# EAGLE board NE555_ADSR (EAGLE 7.4.0)

Size 160 x 100 mm. Coordinates in mm from the lower left corner, seen from the top.
Outline: 0,0 160,0 160,100 0,100 0,0
Copper layers (1*16): Top 0.035mm / dielectric 1.5mm / Bottom 0.035mm
Design rules "default": minimum track width 10mil, minimum drill 24mil, track to track 8mil, track to pad 8mil, pad to pad 8mil, via to via 8mil, smd to smd 8mil, copper to edge 40mil, drill to drill 8mil, minimum pad ring 10mil, minimum via ring 8mil, stop-mask expansion 4mil, vias tented up to drill 0mil, thermal gap 10mil

## Footprints (pad centres in the part's own frame; a part is rotated, then mirrored left to right if it is on the bottom)
E3,5-8 = drill 0.813 pad 1.6: + -1.778,0 | drill 0.813 pad 1.6 octagon: - 1.778,0
C7.5B3 = drill 0.914 pad 1.905 octagon: 1 -3.81,0; 2 3.81,0
DO35-7 = drill 0.813 long: A 3.81,0; C -3.81,0
DIL08-ROUND = drill 0.813 pad 1.676: 1 -3.81,-3.81; 2 -1.27,-3.81; 3 1.27,-3.81; 4 3.81,-3.81; 5 3.81,3.81; 6 1.27,3.81; 7 -1.27,3.81; 8 -3.81,3.81
DIL08 = drill 0.813 pad 1.27: 1 -3.81,-3.81; 2 -1.27,-3.81; 3 1.27,-3.81; 4 3.81,-3.81; 5 3.81,3.81; 6 1.27,3.81; 7 -1.27,3.81; 8 -3.81,3.81
1X06 = drill 1.016 octagon: 1 -6.35,0; 2 -3.81,0; 3 -1.27,0; 4 1.27,0; 5 3.81,0; 6 6.35,0
1X02 = drill 1.016 long: 1 -1.27,0; 2 1.27,0
1X03 = drill 1.016 long: 1 -2.54,0; 2 0,0; 3 2.54,0
0207/10 = drill 0.813 octagon: 1 -5.08,0; 2 5.08,0
TO92 = drill 0.813 octagon: 1 1.27,0; 2 0,1.905; 3 -1.27,0

## Placement (x,y rotation side)
C1  [E3,5-8]  -45.72,5.08 0 top  (outside the outline)
C2  [E3,5-8]  -55.88,5.08 0 top  (outside the outline)
C3  10n  [C7.5B3]  -19.05,24.13 0 top  (outside the outline)
C4  10n  [C7.5B3]  -30.48,24.13 0 top  (outside the outline)
C5  4uF  [E3,5-8]  -19.05,15.24 0 top  (outside the outline)
D1  1N4148  [DO35-7]  -19.05,31.75 0 top  (outside the outline)
D2  1N4148  [DO35-7]  -31.75,31.75 0 top  (outside the outline)
D3  1N4148  [DO35-7]  -44.45,31.75 0 top  (outside the outline)
D4  1N4148  [DO35-7]  -57.15,31.75 0 top  (outside the outline)
D6  1N4148DO35-7  [DO35-7]  -46.99,24.13 0 top  (outside the outline)
D7  1N4148  [DO35-7]  -19.05,38.1 0 top  (outside the outline)
IC1  NE555N  [DIL08-ROUND]  -19.05,5.08 0 top  (outside the outline)
IC2  TL082P  [DIL08]  -31.75,5.08 0 top  (outside the outline)
JP1  [1X06]  -45.72,36.83 0 top  (outside the outline)
JP2  [1X02]  -27.94,36.83 0 top  (outside the outline)
JP3  [1X02]  -34.29,36.83 0 top  (outside the outline)
JP4  2M2_A  [1X02]  -52.07,13.97 0 top  (outside the outline)
JP5  2M2_R  [1X02]  -44.45,13.97 0 top  (outside the outline)
JP6  2M2_D  [1X02]  -36.83,13.97 0 top  (outside the outline)
JP7  10k_S  [1X03]  -27.94,13.97 0 top  (outside the outline)
R1  4k7  [0207/10]  -57.15,43.18 0 top  (outside the outline)
R2  10k  [0207/10]  -19.05,48.26 0 top  (outside the outline)
R3  22k  [0207/10]  -31.75,48.26 0 top  (outside the outline)
R4  4k7  [0207/10]  -44.45,48.26 0 top  (outside the outline)
R5  4k7  [0207/10]  -57.15,48.26 0 top  (outside the outline)
R6  10k  [0207/10]  -19.05,53.34 0 top  (outside the outline)
R7  [0207/10]  -31.75,53.34 0 top  (outside the outline)
R8  220  [0207/10]  -44.45,53.34 0 top  (outside the outline)
R9  [0207/10]  -57.15,53.34 0 top  (outside the outline)
R10  [0207/10]  -19.05,58.42 0 top  (outside the outline)
R11  3.3k  [0207/10]  -31.75,58.42 0 top  (outside the outline)
T1  2N3904  [TO92]  -22.86,43.18 0 top  (outside the outline)
T2  2N3904  [TO92]  -35.56,43.18 0 top  (outside the outline)
T3  2N3904  [TO92]  -48.26,43.18 0 top  (outside the outline)

## Library data of the parts
C1 C2 C5 R1-R11 = resistor
C3 C4 = capacitor-wima
D1-D4 D6 D7 = diode
IC1 JP1 = adafruit
IC2 = linear; DATA_SHEET: <a href="http://www.ti.com/lit/ds/symlink/tl084a.pdf"> Data sheet </a>
JP2-JP7 = pinhead
T1-T3 = transistor

## Nets
A: D7.A IC1.3
GND: C1.- C2.+ C4.2 C5.- D1.A D6.A IC1.1 IC2.8 JP1.3 JP1.4 JP2.1 T1.3 T2.3 T3.3
N$1: R6.1 T3.2
N$2: JP2.2 R2.2
N$3: JP4.2 R8.2
N$4: C4.1 IC1.5
N$5: R1.1 R3.1 T1.1
N$6: D3.C JP7.2
N$7: IC1.2 R5.1 T3.1
N$8: D6.C R2.1 R7.1 T1.2
N$9: C3.2 D1.C R6.2
N$10: R3.2 T2.2
N$11: D7.C R8.1
N$12: IC2.1 IC2.2 JP3.1
N$13: JP5.2 R9.2
N$15: JP6.2 R10.2
N$16: D3.A R10.1
N$17: D2.A R9.1
N$18: JP7.1 R11.1
N$19: D4.C IC1.4
N$20: C5.+ IC1.6 IC2.3 JP4.1 JP5.1 JP6.1
R: C3.1 D2.C D4.A R4.1 R7.2 T2.1
S: IC1.7 JP7.3
VCC: C1.+ IC1.8 IC2.4 JP1.5 JP1.6 R1.2 R4.2 R5.2 R11.2
VDD: C2.- JP1.1 JP1.2

## Tracks (layer width: path | path; a pad name or v marks a point on that pad's centre or on a via)
A  (1 unrouted)
GND  (13 unrouted)
N$1  (1 unrouted)
N$2  (1 unrouted)
N$3  (1 unrouted)
N$4  (1 unrouted)
N$5  (2 unrouted)
N$6  (1 unrouted)
N$7  (2 unrouted)
N$8  (3 unrouted)
N$9  (2 unrouted)
N$10  (1 unrouted)
N$11  (1 unrouted)
N$12  (2 unrouted)
N$13  (1 unrouted)
N$15  (1 unrouted)
N$16  (1 unrouted)
N$17  (1 unrouted)
N$18  (1 unrouted)
N$19  (1 unrouted)
N$20  (5 unrouted)
R  (5 unrouted)
S  (1 unrouted)
VCC  (8 unrouted)
VDD  (2 unrouted)